# Allegro board WEEK 11 ECG PROJECT new type 1.brd
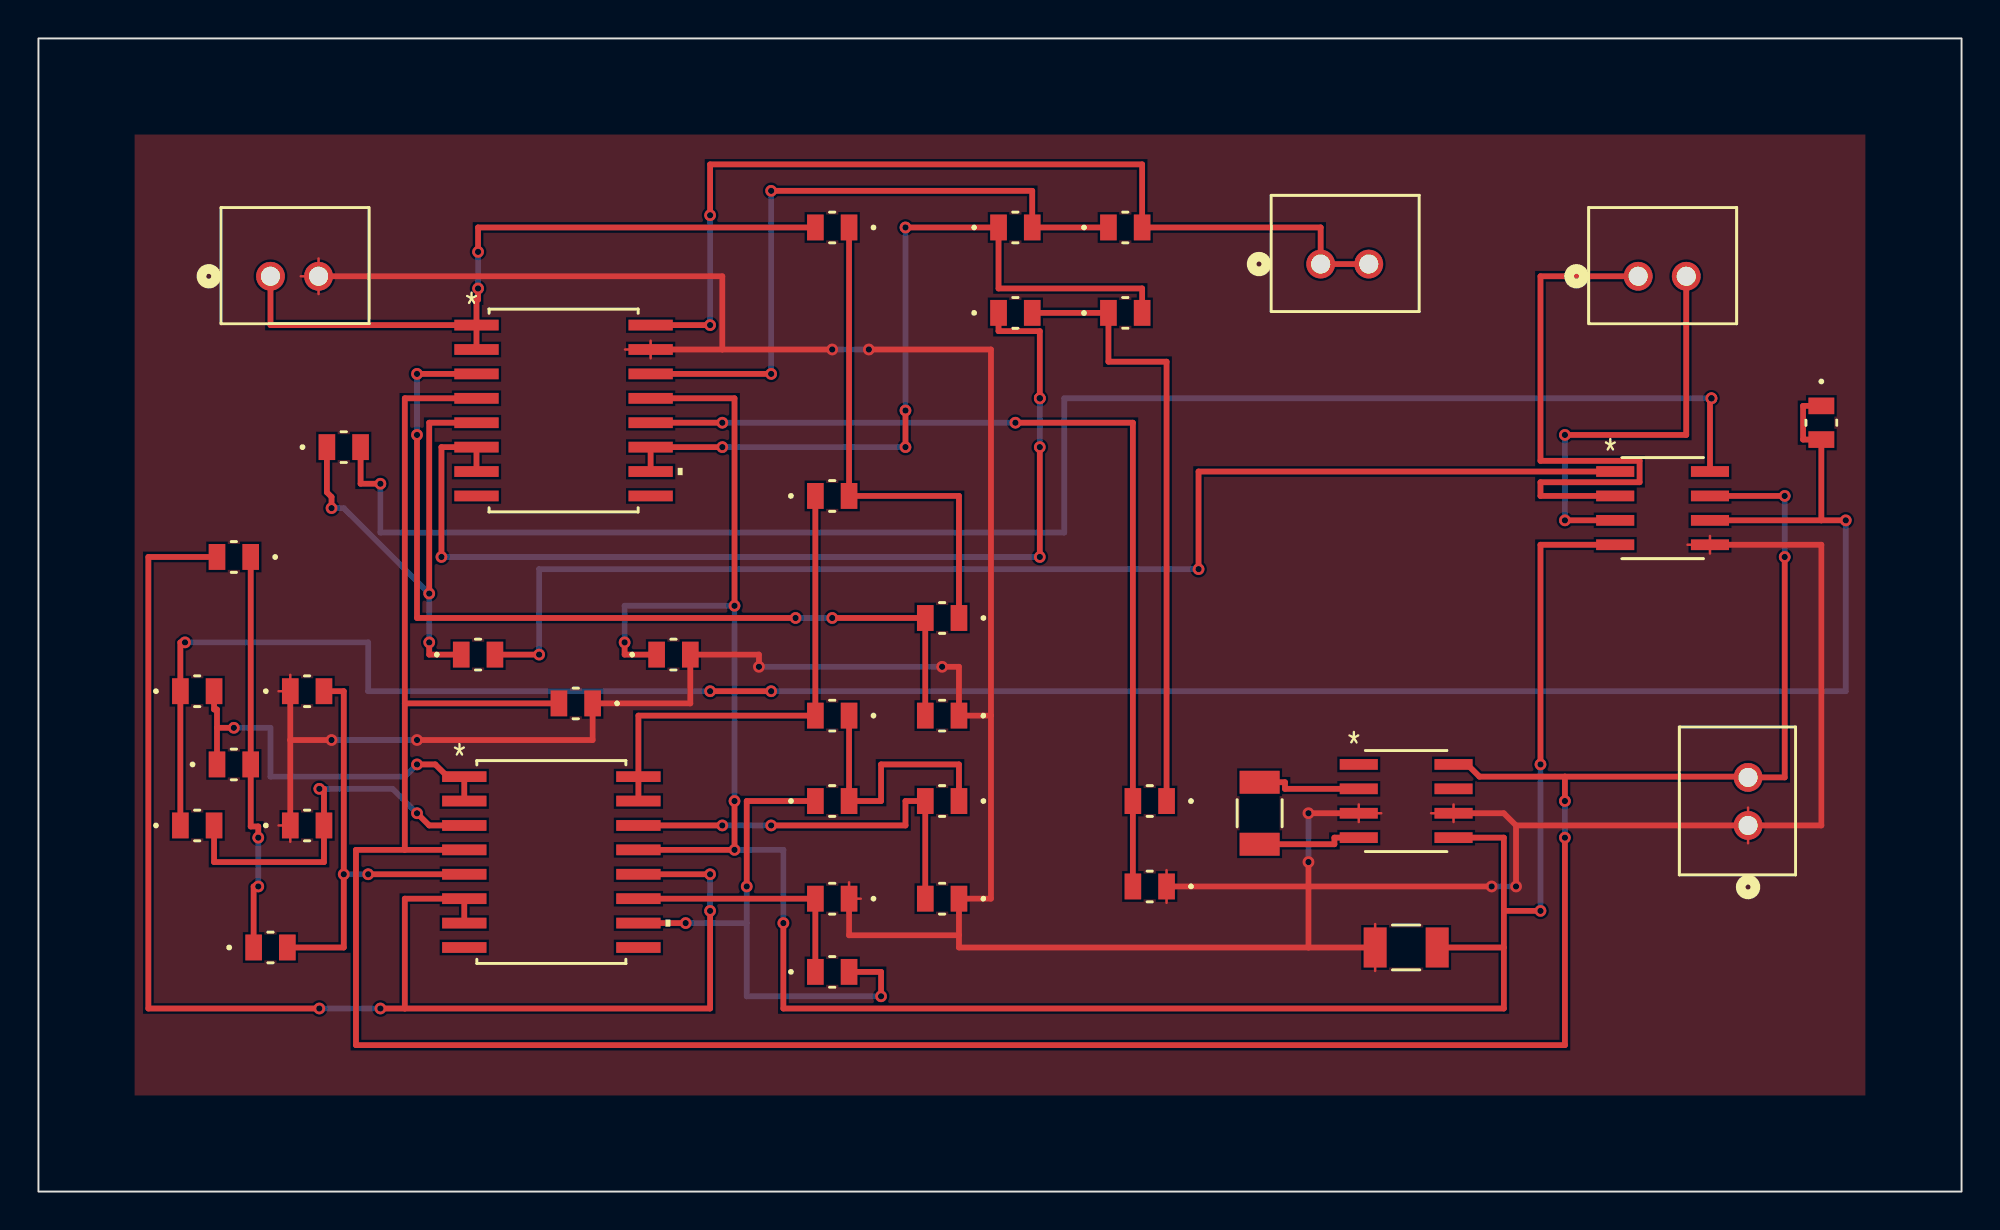
[diagram p0: board, top side]
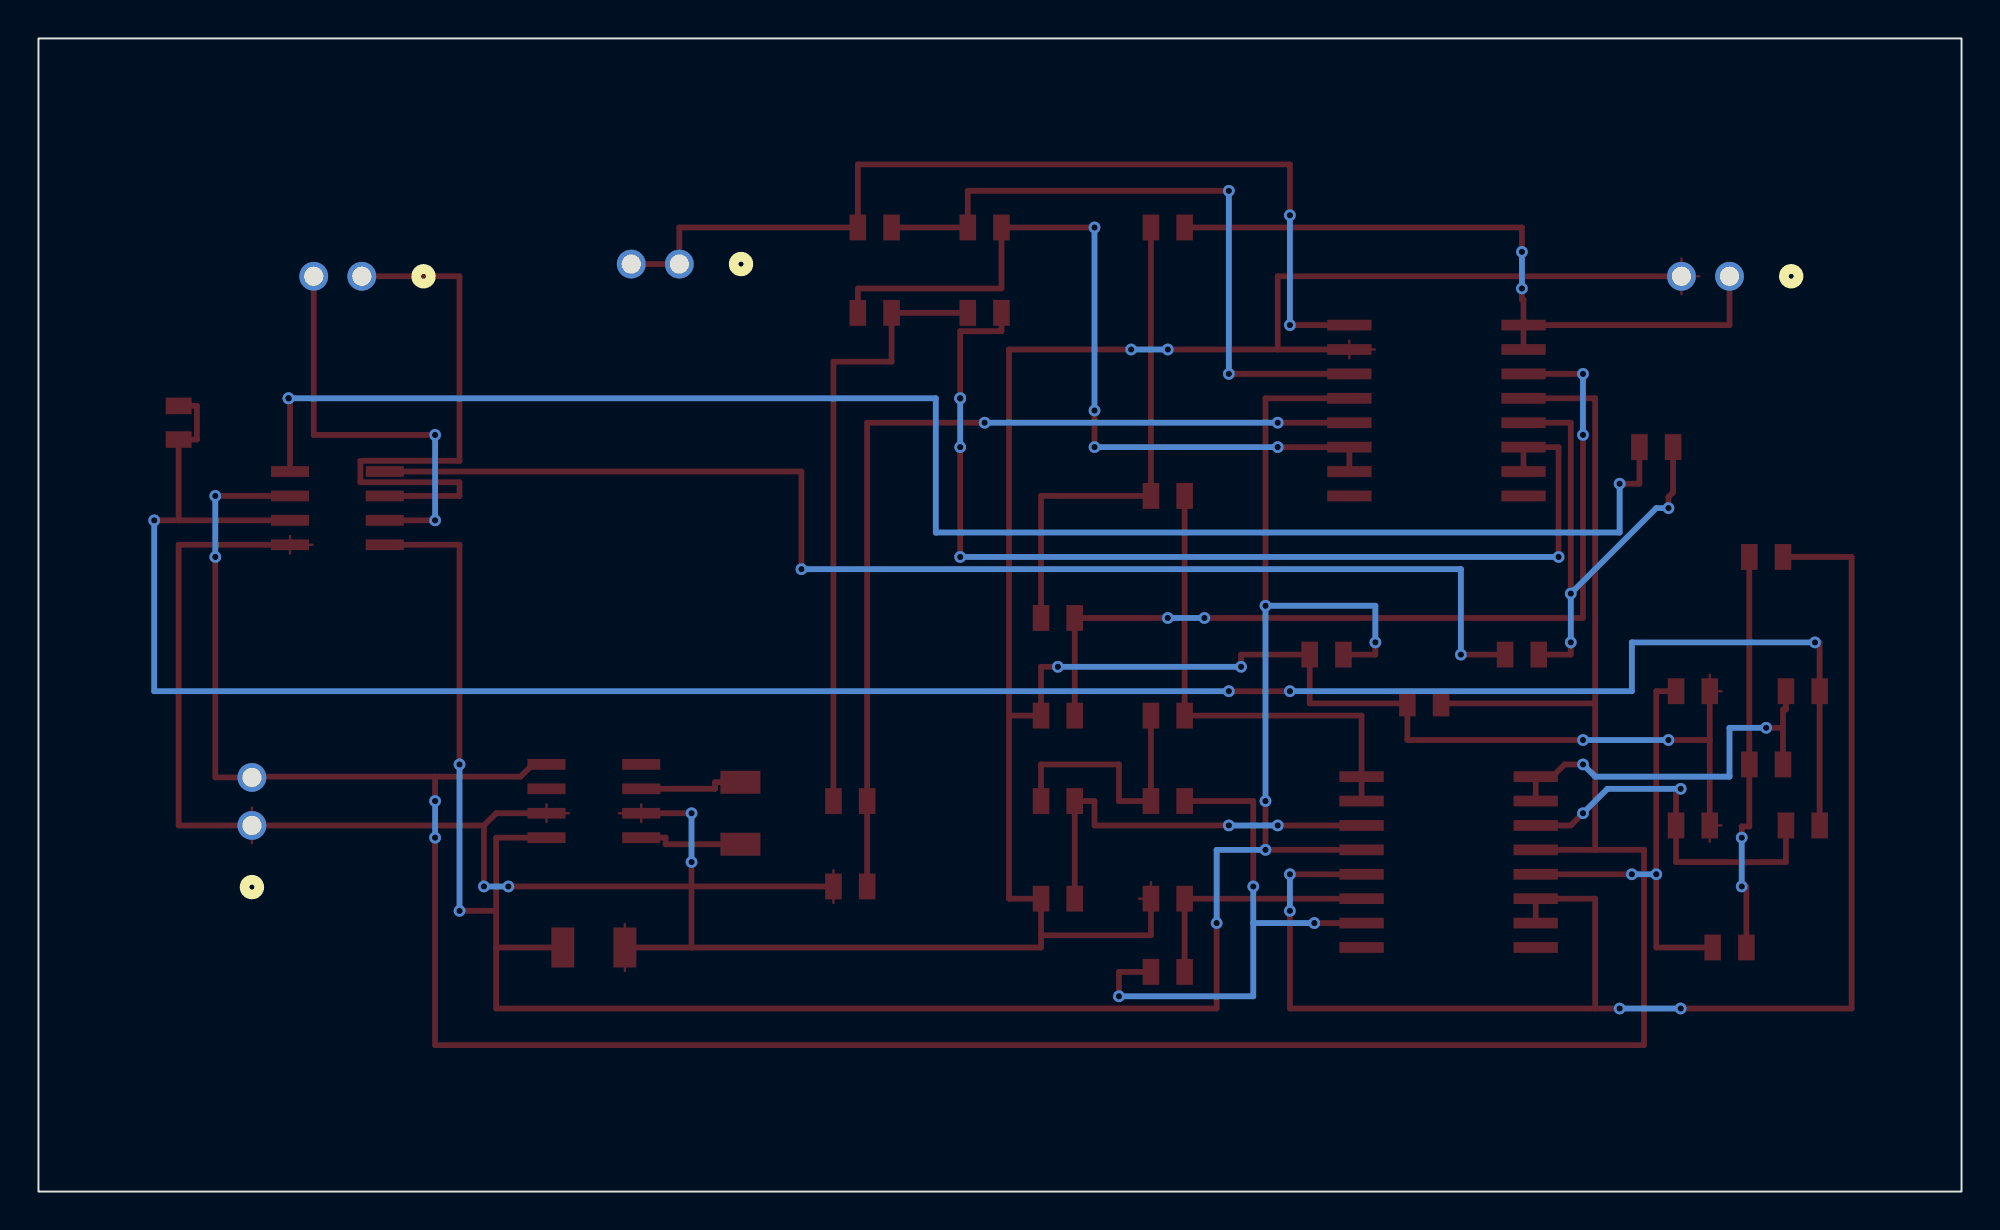
[diagram p1: board, bottom side, seen from below]

Outline 100 x 60 mm; copper layers: TOP, BOTTOM. Coordinates in mm from the lower left corner of the outline.
Outline path: rectangle 0,0 100,60

## Placement (name value [footprint] x y rotation side)
C1  4.7u  [0805]  92.71 40.01 270 top
C2  4.7u  [0805]  8.26 19.05 0 top
C3  4.7u  [0805]  10.16 22.23 0 top
C4  4.7u  [0805]  12.06 12.7 0 top
C5  330n  [0805]  27.94 25.4 180 top
C6  330n  [0805]  33.02 27.94 0 top
C7  47n  [0805]  41.27 24.77 180 top
C8  150n  [0805]  41.27 50.16 180 top
C9  15n  [0805]  46.99 15.24 180 top
C10  6.8n  [0805]  46.99 24.77 180 top
C11  470n  [0805]  50.8 45.72 0 top
C12  100n  [0805]  57.78 20.32 180 top
C13  47u  [CAP_595D_A]  63.5 19.68 270 top
C14  15u  [CAP_595D_A]  71.12 12.7 0 top
J1  CON2  [CONN_B2B-XH-A_LF__SN_]  83.19 47.62 0 top
J2  CON2  [CONN_B2B-XH-A_LF__SN_]  12.06 47.62 0 top
J3  CON2  [CONN_B2B-XH-A_LF__SN_]  66.67 48.26 0 top
J4  CON2  [CONN_B2B-XH-A_LF__SN_]  88.9 19.05 90 top
R1  300k  [0805]  8.26 26.04 0 top
R2  130k  [0805]  10.16 33.02 180 top
R3  25k  [0805]  22.86 27.94 0 top
R4  360k  [0805]  13.97 19.05 0 top
R5  910k  [0805]  13.97 26.04 0 top
R6  25k  [0805]  15.88 38.73 0 top
R7  1.5M  [0805]  41.27 11.43 0 top
R8  1k  [0805]  41.27 15.24 180 top
R9  68k  [0805]  41.27 20.32 0 top
R10  560k  [0805]  46.99 20.32 180 top
R11  47k  [0805]  41.27 36.2 0 top
R12  560k  [0805]  46.99 29.84 180 top
R13  820k  [0805]  56.52 45.72 0 top
R14  1000k  [0805]  56.52 50.16 0 top
R15  1k  [0805]  50.8 50.16 0 top
R16  2.7M  [0805]  57.78 15.88 180 top
U1  INA118/SO  [D8]  84.45 35.56 0 top
U2  OP497/SO  [RW_16]  26.67 17.14 0 top
U3  OP497/SO  [RW_16]  27.3 40.64 0 top
U4  MAX660  [M08A]  71.12 20.32 0 top

## Library data of the parts
C1-C14 = C
J1-J4 = CON2
R1-R16 = R
U1 = INA118/SO_0
U2 U3 = OP497/SO
U4 = MAX660_0

## Footprints (pads in the part's own frame, mm; a bottom-side part is the same pattern mirrored in y, then rotated)
0805
  rect 0.864x1.346 smd: 1(-0.876,0) 2(0.876,0)
CAP_595D_A
  rect 1.194x2.083 smd: 1(-1.613,0) 2(1.613,0)
CONN_B2B-XH-A_LF__SN_
  round 1.499 hole 0.991: 1(0,0) 2(2.5,0)
D8
  rect 1.981x0.559 smd: 1(-2.464,1.905) 2(-2.464,0.635) 3(-2.464,-0.635) 4(-2.464,-1.905) 5(2.464,-1.905) 6(2.464,-0.635) 7(2.464,0.635) 8(2.464,1.905)
M08A
  rect 1.981x0.559 smd: 1(-2.464,1.905) 2(-2.464,0.635) 3(-2.464,-0.635) 4(-2.464,-1.905) 5(2.464,-1.905) 6(2.464,-0.635) 7(2.464,0.635) 8(2.464,1.905)
RW_16
  rect 2.306x0.561 smd: 1(-4.528,4.445) 2(-4.528,3.175) 3(-4.528,1.905) 4(-4.528,0.635) 5(-4.528,-0.635) 6(-4.528,-1.905) 7(-4.528,-3.175) 8(-4.528,-4.445) 9(4.528,-4.445) 10(4.528,-3.175) 11(4.528,-1.905) 12(4.528,-0.635) 13(4.528,0.635) 14(4.528,1.905) 15(4.528,3.175) 16(4.528,4.445)

## Nets
+VCC: C5.2 J4.2 U1.7(V+) U2.4(V+) U3.4(V+) U4.8(V+)
-VCC: C6.1 C14.2 U1.4(V-) U2.13(V-) U3.13(V-) U4.5(OUT)
GND_FIELD SIGNAL: C5.1 C6.2 C9.1 C10.1 C14.1 J2.2 J4.1 R4.1 R5.1 R8.1 R16.1 U1.5(REF) U3.15(-IN) U4.3(GND) U4.6(LV)
DRIVEN: R3.1 R6.1 U3.5(+IN)
N00686: J1.2 U1.3(+VIN)
N00690: J1.1 U1.2(-VIN)
N00694: C1.1 C1.2 C2.1 R1.1 U1.6(VO)
N00706: C2.2 R4.2 U2.3(+IN)
N00754: C3.1 R1.2 U2.1(OUT) U2.2(-IN)
N00843: C3.2 C4.1 R2.1
N01008: C4.2 R5.2 U2.5(+IN)
N01022: R2.2 U2.6(-IN) U2.7(OUT) U2.12(+IN)
N01570: R3.2 U1.1(RG1)
N01574: R6.2 U1.8(RG2)
N02327: R7.1 R8.2 U2.11(-IN)
N02368: R7.2 R9.1 U2.10(OUT)
N02372: C7.1 R9.2 R10.1
N02376: C9.2 R10.2 U2.14(+IN)
N02380: C7.2 R11.1 U2.15(-IN) U2.16(OUT)
N02384: C8.1 R11.2 R12.1
N02388: C10.2 R12.2 U3.3(+IN)
N02392: C8.2 J2.1 U3.1(OUT) U3.2(-IN)
N05501: C11.1 U3.6(-IN) U3.7(OUT)
N05505: C11.2 C12.1 R13.1
N05509: C12.2 R16.2 U3.12(+IN)
N05545: R13.2 R15.1 U3.10(OUT) U3.11(-IN)
N05553: R14.1 R15.2 U3.14(+IN)
N05656: J3.1 J3.2 R14.2 U3.16(OUT)
N06041: C13.1 U4.2(CAP+)
N06048: C13.2 U4.4(CAP-)

Pads without a net: U2 8 9; U3 8 9; U4 1 7

## Via types
v1: diameter 0.61, hole 0.33, TOP to BOTTOM, 73 vias

## Routing (per net, layer and track width the routed paths; a pad name or vN(x,y) marks a point on that pad's centre or on a via; arc(x,y) is an arc through that point)
+VCC: length 163.9
  TOP w0.3: v1(90.81,36.2) U1.7 ; v1(90.81,33.02) 90.81,21.55 J4.2 88.9,21.59 79.38,21.59 ; v1(79.38,18.41) 79.38,7.62 16.51,7.62 16.51,17.78 19.05,17.78 ; v1(79.38,20.32) 79.38,21.59 ; 79.38,21.59 74.93,21.59 74.3,22.23 U4.8 ; 19.05,25.4 19.05,41.27 U3.4 ; 19.05,25.4 C5.2 ; 19.05,25.4 19.05,17.78 ; U2.4 19.05,17.78
  BOTTOM w0.3: v1(79.38,18.41) v1(79.38,20.32) ; v1(90.81,33.02) v1(90.81,36.2)
-VCC: length 130.8
  TOP w0.3: U1.4 78.11,33.66 v1(78.11,22.23) ; v1(36.2,30.48) 36.2,41.27 U3.13 ; v1(78.11,14.61) 76.2,14.61 ; 76.2,14.61 76.2,18.41 U4.5 ; 76.2,14.61 76.2,12.7 ; 76.2,12.7 C14.2 ; 76.2,12.7 76.2,9.53 38.73,9.53 v1(38.73,13.97) ; v1(36.2,20.32) v1(36.2,17.78) U2.13 ; v1(30.48,28.57) 30.48,27.94 C6.1
  BOTTOM w0.3: v1(38.73,13.97) 38.73,17.78 v1(36.2,17.78) ; v1(30.48,28.57) 30.48,30.48 v1(36.2,30.48) v1(36.2,20.32) ; v1(78.11,22.23) v1(78.11,14.61)
GND_FIELD SIGNAL: length 248
  TOP w0.127: 58.66,15.02 R16.1 58.66,16.73 ; 12.48,26.04 R5.1 13.09,26.89 ; 69.51,11.48 C14.1 69.51,13.92 ; 72.42,19.68 U4.6 ; U4.6 73.58,20.14 ; U4.6 73.58,19.23 ; 12.48,19.05 R4.1 13.09,18.2 ; 86.92,33.2 U1.5 ; U1.5 85.75,33.66 ; U1.5 86.92,34.11 ; 31.83,43.36 U3.15 ; U3.15 30.5,43.81 ; U3.15 31.83,44.27 ; 42.76,15.24 R8.1 42.15,16.09 ; 13.64,47.62 J2.2 ; J2.2 14.57,46.7 ; J2.2 14.57,48.55 ; 88.9,19.98 J4.1 88.9,18.12 ; 68.66,19.23 U4.3 ; U4.3 69.82,19.68 ; U4.3 68.66,20.14
  TOP w0.3: 76.83,19.05 v1(76.83,15.88) ; 76.83,19.05 J4.1 92.71,19.05 92.71,33.66 U1.5 ; 76.83,19.05 76.2,19.68 U4.6 ; 49.53,24.77 49.53,15.24 C9.1 47.87,13.34 ; 49.53,24.77 C10.1 47.87,27.3 v1(46.99,27.3) ; 49.53,24.77 49.53,43.81 v1(43.18,43.81) ; 66.04,12.7 66.04,15.88 ; 66.04,12.7 C14.1 ; 66.04,12.7 47.87,12.7 47.87,13.34 ; 66.04,15.88 v1(66.04,17.14) ; 66.04,15.88 R16.1 ; 66.04,15.88 v1(75.56,15.88) ; v1(19.68,23.5) 28.82,23.5 C5.1 33.9,25.4 C6.2 37.47,27.94 v1(37.47,27.3) ; U3.15 35.56,43.81 ; 35.56,43.81 35.56,47.62 J2.2 ; 35.56,43.81 v1(41.27,43.81) ; v1(15.24,23.5) 13.09,23.5 ; 13.09,23.5 R5.1 ; 13.09,23.5 R4.1 ; 47.87,13.34 42.15,13.34 R8.1 ; v1(66.04,19.68) U4.3
  BOTTOM w0.3: v1(46.99,27.3) v1(37.47,27.3) ; v1(41.27,43.81) v1(43.18,43.81) ; v1(76.83,15.88) v1(75.56,15.88) ; v1(66.04,17.14) v1(66.04,19.68) ; v1(19.68,23.5) v1(15.24,23.5)
DRIVEN: length 26.4
  TOP w0.3: R6.1 15,36.38 15.24,36.14 v1(15.24,35.56) ; U3.5 20.32,40.01 v1(20.32,31.11) ; v1(20.32,28.57) 20.32,27.94 R3.1
  BOTTOM w0.3: v1(20.32,28.57) v1(20.32,31.11) 15.88,35.56 v1(15.24,35.56)
N00686: length 21.6
  TOP w0.3: v1(79.38,34.92) 81.99,34.92 ; J1.2 85.69,39.37 v1(79.38,39.37)
  BOTTOM w0.3: v1(79.38,39.37) v1(79.38,34.92)
N00690: length 30.7
  TOP w0.3: J1.1 78.11,47.62 78.11,38.02 83.26,38.02 83.26,36.91 78.11,36.91 78.11,36.2 U1.2
N00694: length 122.5
  TOP w0.3: v1(7.62,28.57) 7.38,28.57 R1.1 C2.1 ; v1(34.92,26.04) v1(38.1,26.04) ; C1.1 91.76,40.88 91.76,39.13 C1.2 92.71,34.92 ; 86.92,34.92 92.71,34.92 ; 92.71,34.92 v1(93.98,34.92)
  BOTTOM w0.3: v1(34.92,26.04) 17.14,26.04 17.14,28.57 v1(7.62,28.57) ; v1(38.1,26.04) 93.98,26.04 v1(93.98,34.92)
N00706: length 20
  TOP w0.3: v1(14.61,20.95) 14.85,20.95 R4.2 14.85,17.14 9.13,17.14 C2.2 ; U2.3 20.32,19.05 v1(19.68,19.68)
  BOTTOM w0.3: v1(14.61,20.95) 18.41,20.95 v1(19.68,19.68)
N00754: length 21.2
  TOP w0.3: 9.28,24.13 C3.1 ; 9.28,24.13 9.28,25.08 9.13,25.08 R1.2 ; 9.28,24.13 v1(10.16,24.13) ; U2.2 U2.1 21.27,21.59 20.63,22.23 v1(19.68,22.23)
  BOTTOM w0.3: v1(10.16,24.13) 12.06,24.13 12.06,21.59 19.05,21.59 v1(19.68,22.23)
N00843: length 21
  TOP w0.3: v1(11.43,15.88) 11.19,15.88 C4.1 ; R2.1 C3.2 11.04,19 11.43,19 v1(11.43,18.41)
  BOTTOM w0.3: v1(11.43,15.88) v1(11.43,18.41)
N01008: length 23.6
  TOP w0.3: C4.2 15.88,12.7 v1(15.88,16.51) 15.88,26.04 R5.2 ; U2.5 v1(17.14,16.51)
  BOTTOM w0.3: v1(17.14,16.51) v1(15.88,16.51)
N01022: length 77.1
  TOP w0.3: R2.2 5.71,33.02 5.71,9.53 v1(14.61,9.53) ; 19.05,9.53 34.92,9.53 v1(34.92,14.61) ; 19.05,9.53 19.05,15.24 U2.6 U2.7 ; 19.05,9.53 v1(17.78,9.53) ; v1(34.92,16.51) U2.12
  BOTTOM w0.3: v1(14.61,9.53) v1(17.78,9.53) ; v1(34.92,14.61) v1(34.92,16.51)
N01570: length 67.8
  TOP w0.3: v1(26.04,27.94) R3.2 ; U1.1 60.33,37.47 v1(60.33,32.38)
  BOTTOM w0.3: v1(26.04,27.94) 26.04,32.38 v1(60.33,32.38)
N01574: length 85.6
  TOP w0.3: v1(87,41.27) 86.92,41.27 U1.8 ; R6.2 16.75,36.83 v1(17.78,36.83)
  BOTTOM w0.3: v1(87,41.27) 53.34,41.27 53.34,34.29 17.78,34.29 v1(17.78,36.83)
N02327: length 13
  TOP w0.3: R7.1 R8.2 U2.11
N02368: length 29.3
  TOP w0.3: R7.2 43.81,11.43 v1(43.81,10.16) ; U2.10 v1(33.66,13.97) ; R9.1 36.83,20.32 v1(36.83,15.88)
  BOTTOM w0.3: 36.83,13.97 36.83,10.16 v1(43.81,10.16) ; 36.83,13.97 v1(33.66,13.97) ; 36.83,13.97 v1(36.83,15.88)
N02372: length 14
  TOP w0.3: R10.1 47.87,22.23 43.81,22.23 43.81,20.32 R9.2 C7.1
N02376: length 21.3
  TOP w0.3: v1(38.1,19.05) 45.09,19.05 45.09,20.32 R10.2 C9.2 ; v1(35.56,19.05) U2.14
  BOTTOM w0.3: v1(38.1,19.05) v1(35.56,19.05)
N02380: length 25.1
  TOP w0.3: U2.15 U2.16 31.2,24.77 C7.2 R11.1
N02384: length 26
  TOP w0.3: R12.1 47.87,36.2 R11.2 C8.1
N02388: length 47.3
  TOP w0.3: C10.2 R12.2 v1(41.27,29.84) ; v1(19.68,39.37) 19.68,29.84 v1(39.37,29.84) ; v1(19.68,42.55) U3.3
  BOTTOM w0.3: v1(19.68,39.37) v1(19.68,42.55) ; v1(41.27,29.84) v1(39.37,29.84)
N02392: length 37.2
  TOP w0.3: C8.2 22.86,50.16 v1(22.86,48.9) ; U3.2 U3.1 ; U3.1 22.78,46.41 22.86,46.41 v1(22.86,46.99) ; U3.1 12.06,45.09 J2.1
  BOTTOM w0.3: v1(22.86,48.9) v1(22.86,46.99)
N05501: length 54.8
  TOP w0.3: U3.7 U3.6 20.95,38.73 v1(20.95,33.02) ; v1(52.07,41.27) 52.07,44.77 49.92,44.77 C11.1 ; v1(52.07,38.73) v1(52.07,33.02)
  BOTTOM w0.3: v1(52.07,33.02) v1(20.95,33.02) ; v1(52.07,41.27) v1(52.07,38.73)
N05505: length 32.4
  TOP w0.3: C11.2 R13.1 55.64,43.18 58.66,43.18 C12.1
N05509: length 49.2
  TOP w0.3: v1(50.8,40.01) 56.91,40.01 C12.2 R16.2 ; v1(35.56,40.01) U3.12
  BOTTOM w0.3: v1(50.8,40.01) v1(35.56,40.01)
N05545: length 42.7
  TOP w0.3: U3.10 U3.11 v1(35.56,38.73) ; v1(45.09,50.16) R15.1 49.92,46.99 57.39,46.99 R13.2 ; v1(45.09,38.73) v1(45.09,40.64)
  BOTTOM w0.3: v1(45.09,40.64) v1(45.09,50.16) ; v1(35.56,38.73) v1(45.09,38.73)
N05553: length 35.2
  TOP w0.3: U3.14 v1(38.1,42.55) ; R14.1 R15.2 51.68,52.07 v1(38.1,52.07)
  BOTTOM w0.3: v1(38.1,42.55) v1(38.1,52.07)
N05656: length 50.9
  TOP w0.3: v1(34.92,45.09) U3.16 ; J3.2 J3.1 66.67,50.16 R14.2 57.39,53.45 34.92,53.45 v1(34.92,50.8)
  BOTTOM w0.3: v1(34.92,50.8) v1(34.92,45.09)
N06041: length 5.5
  TOP w0.3: U4.2 64.82,20.95 64.82,21.3 C13.1
N06048: length 5.5
  TOP w0.3: U4.4 67.39,18.41 67.39,18.07 C13.2

## Copper pours and planes (outline as drawn; the poured copper is in the pictures)
GND_FIELD SIGNAL on TOP: 5,5 5,55 95,55 95,5
